# Altium PCB PCB1.PcbDoc
Units mil, origin at the board's own origin, x right, y up, seen from the top; angles counter-clockwise.
Board outline 4535 x 2760 mil, 2 copper layers (Top Layer, Bottom Layer); 39 components, 50 nets, 237 pads, 48 vias.
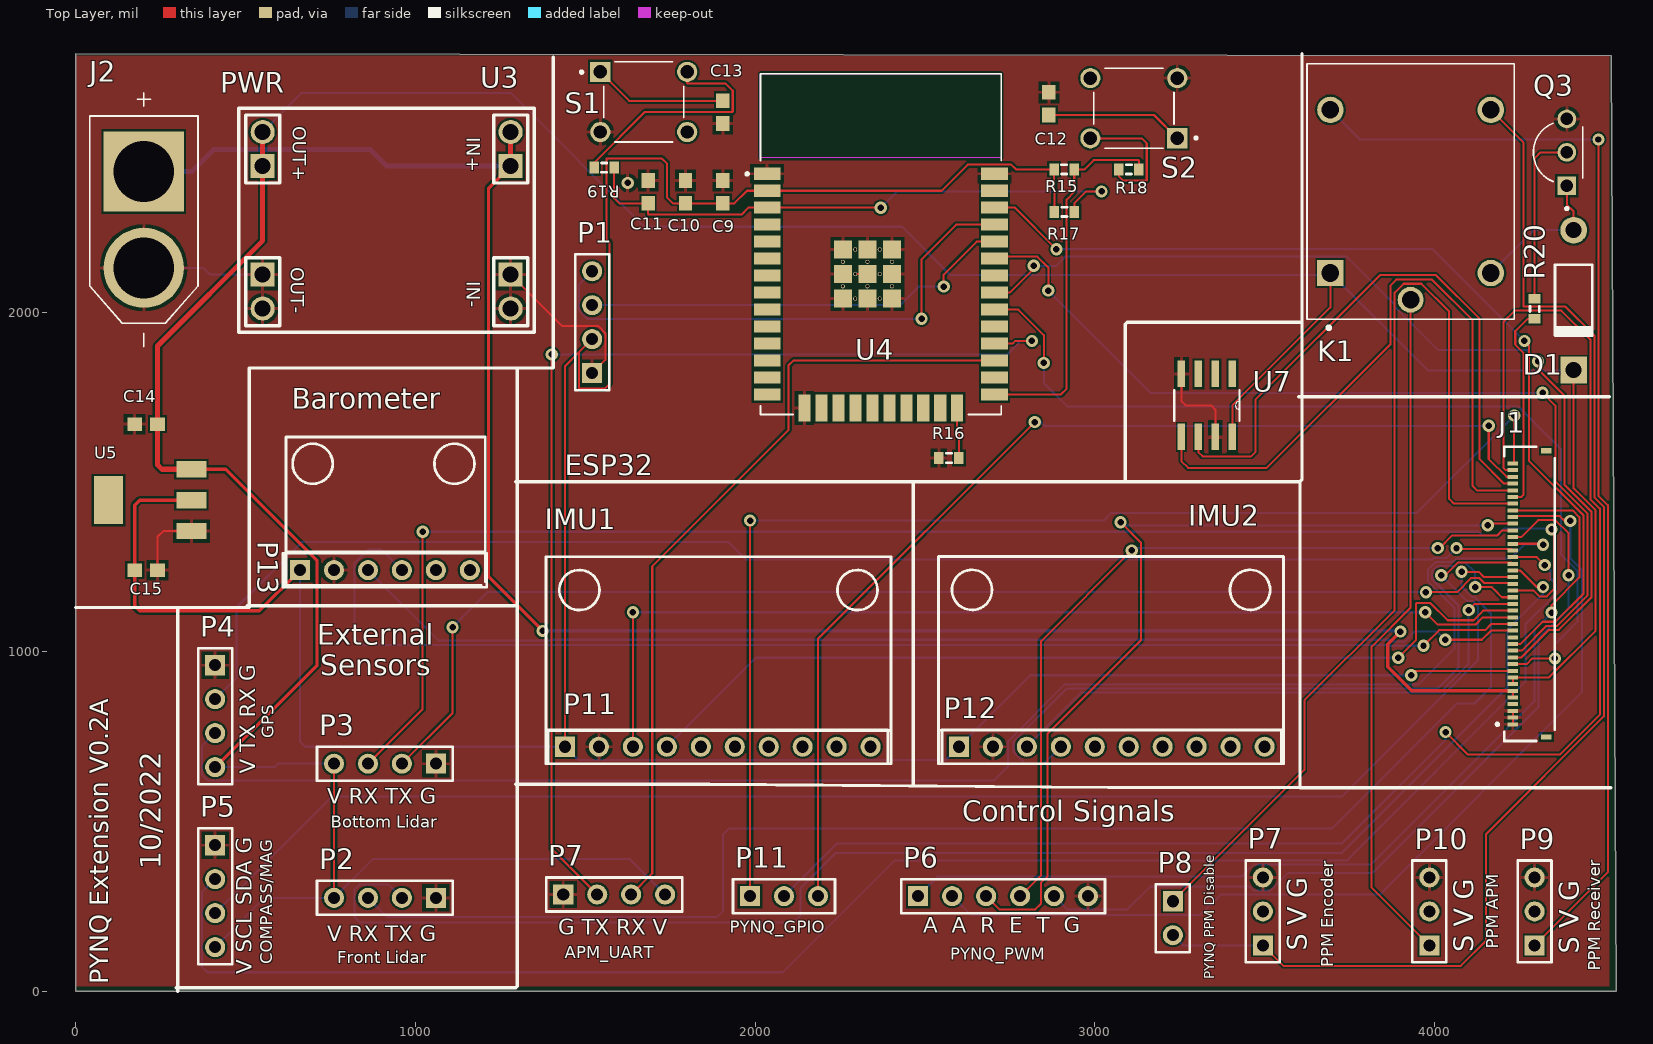
[diagram p0: Top Layer view]
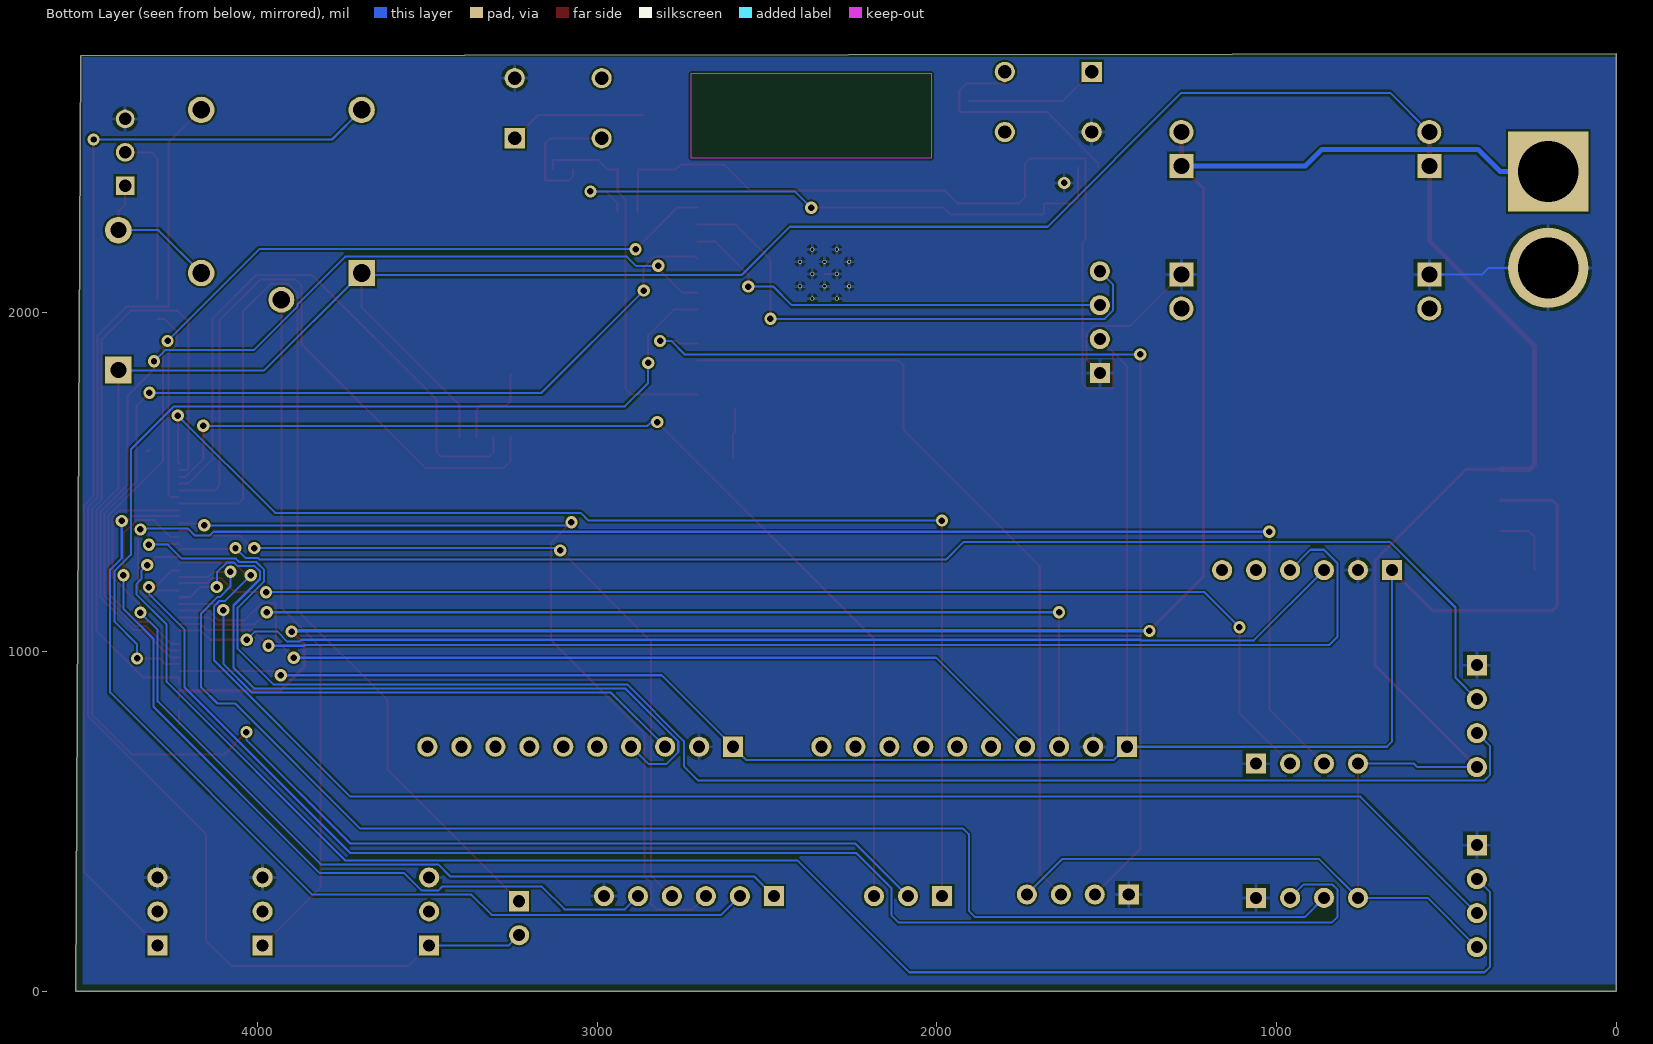
[diagram p1: Bottom Layer view, seen from below]

## Layer stack, top to bottom
Top Solder: solder mask 0.4, Solder Resist, Dk 3.5
Top Layer: signal copper 1.4
Dielectric 1: dielectric 12.6, FR-4, Dk 4.8
Bottom Layer: signal copper 1.4
Bottom Solder: solder mask 0.4, Solder Resist, Dk 3.5

## Board outline
0,0 4535,0 4520,2755 0,2760

## Design rules (kind name [scope] priority, off if disabled: settings)
Clearance [All] p1: gap=6 ignorepadtopadclearanceinfootprint=FALSE except(0: Arc-Hole Track-Hole SMDPad-Hole THPad-Hole Via-Hole Fill-Hole Poly-Hole Region-Hole Text-Hole)
MinimumSolderMaskSliver [All] p1: minsoldermaskwidth=3.8
PolygonConnect [All] p1: connectstyle=Relief reliefconductorwidth=10 reliefentries=4 polygonreliefangle="90 Angle" airgapwidth=10
RoomDefinition Sheet1 [InComponentClass('Sheet1')] p1 off: confinementstyle=ConfineIn formatcopy=TRUE lockcomponents=FALSE outline 4665,1570 8030,1570 8030,2485 4665,2485
RoomDefinition ESP32 [InComponentClass('ESP32')] p2 off: confinementstyle=ConfineIn formatcopy=TRUE lockcomponents=FALSE outline 4665,0 8390,0 8390,1160 4665,1160
RoomDefinition Voltage_Regulators [InComponentClass('Voltage_Regulators')] p3 off: confinementstyle=ConfineIn formatcopy=TRUE lockcomponents=FALSE outline 4665,2535 6880,2535 6880,3630 4665,3630
RoomDefinition Sensors [InComponentClass('Sensors')] p4 off: confinementstyle=ConfineIn formatcopy=TRUE lockcomponents=FALSE outline 4665,1210 10145,1210 10145,1520 4665,1520
RoutingVias [All] p1: holewidth=19 width=36 viastyle="Through Hole" minholewidth=18 minwidth=33 maxholewidth=28 maxwidth=50
SilkToSilkClearance [All] p1: silktosilkclearance=5
SilkToSolderMaskClearance [IsPad] p1: minsilkscreentomaskgap=3 clearancetoexposedcopper=TRUE
SolderMaskExpansion [All] p1: expansion=4 istentingtop=FALSE
Width [All] p1: maxlimit=15 minlimit=4.5 preferedwidth=6 minimp=50.000000 maximp=50.000000 favimp=50.000000
27 further rules are at their usual default settings.

## Classes and differential pairs
component class Voltage_Regulators: C14 C15 J2 U3 U5
component class Sheet1: D1 J1 K1 P2 P3 P4 P5 P6 P7 P8 P9 P10 P11 Q3 R20
component class Sensors: P11 P12 P13 U7
component class ESP32: C9 C10 C11 C12 C13 P1 R15 R16 R17 R18 R19 S1 S2 U4

## Components (designator, comment, footprint, x,y, rotation, side; value= is the part's Value field where it differs from the comment)
C9 "100uF/6.3V" CAPC1608X90 1905,2353.47 r270 top
C10 "1uF/10V" CAPC1608X90 1795,2353.46 r270 top
C11 "0.1uf" CAPC1608X90 1685,2353.46 r90 top
C12 "0.1uf" CAPC1608X90 2865,2613.46 r90 top
C13 "0.1uf" CAPC1608X90 1905,2588.46 r270 top
C14 "10uF" CAPC1608X90 206.54,1670 r180 top
C15 "10uF" CAPC1608X90 206.54,1240 r0 top
D1 "Diode 1N4001" DO-41 4410,2035 r270 top
J1 "FFC2B28-40-G" GCT_FFC2B28-40-G 4280,1170 r90 top
J2 "XT60-M" AMASS_XT60-M 200,2271.73 r270 top
K1 "SRD-05VDC-SL-C" RELAY_SRD-05VDC-SL-C 3930,2355 r90 top
P1 "ESP_UART" HDR1X4 1520,1820 r90 top
P2 "Lidar_F" HDR1X4 1060,275 r180 top
P3 "Lidar_B" HDR1X4 1060,670 r180 top
P4 "GPS_Prim" HDR1X4 410,960 r270 top
P5 "Compass_Prim" HDR1X4 410,430 r270 top
P6 "PWM_PYNQ" HDR1X6 2480,280 r0 top
P7 "APM_UART" HDR1X4 1435,285 r0 top
P7 "PPM_PYNQ_Encoder" HDR1X3 3495,135 r90 top
P8 "PPM_Jumper" HDR1X2 3230,265 r270 top
P9 "PPM_REC" HDR1X3 4295,135 r90 top
P10 "PPM_OUT" HDR1X3 3985,135 r90 top
P11 "IMU1" HDR1X10 1440,720 r0 top
P11 "GPIO" HDR1X3 1985,280 r0 top
P12 "IMU2" HDR1X10 2600,720 r0 top
P13 "BMP280" HDR1X6 660,1240 r0 top
Q3 "BC547B" TO92250P510H770-3 4364.21,2470 r90 top
R15 "Res3" J1-0603 2910,2420 r180 top value=10K
R16 "Res3" J1-0603 2570.47,1570 r180 top value="5k(Optional-internal pull down)"
R17 "Res3" J1-0603 2910.47,2295 r180 top value=10K(1%)
R18 "Res3" J1-0603 3100.47,2420 r0 top value=470R(1%)
R19 "Res3" J1-0603 1555.47,2425 r0 top value=470R(1%)
R20 "0603" J1-0603 4295,2009.53 r90 top value=10K
S1 "TS02-66-73-BK-100-SCR-D" SW_TS02-66-73-BK-100-SCR-D 1672.05,2618.58 r0 top
S2 "TS02-66-73-BK-100-SCR-D" SW_TS02-66-73-BK-100-SCR-D 3115,2600 r180 top
U3 "Component_1" PCBComponent_1 1210,2285 r180 top
U4 "ESP32-WROOM-32" MODULE_ESP32-WROOM-32 2370,2200 r0 top
U5 "AMS1117-3.3" SOT223 218,1446 r180 top
U7 "24LC256-I/SN" SOIC127P600X175-8N 3330,1725 r270 top

## Footprints (in the part's own frame and the unit in brackets; to place one, negate y for a bottom-side part, rotate by r counter-clockwise, add the part's x,y. Pads: shape width x height; smd on the part's side, far side on the other; paste and mask are expansions set on the pad)
AMASS_XT60-M [mm]
  round 6 hole 4.55: N(3.6,0)
  rect 6x6 hole 4.55: P(-3.6,0)
  silkscreen extent -9.5,-4.05 9.5,4.05, body extent -4.05,0 4.05,20.5, height 7.75
CAPC1608X90 [mm]
  rect 1.1x1 smd: 1(-0.85,0) 2(0.85,0)
DO-41 [mm] "Diode, Axial; Body 5.2 x 2.7 mm (LxDia. max), Lead Dia. 0.86 mm (max)"
  round 2 hole 1.2: 1(-5.23,0)
  rect 2x2 hole 1.2: 2(5.23,0)
  silkscreen extent -2.65,-1.4 2.75,1.4
GCT_FFC2B28-40-G [mm]
  rect 0.3x0.8 smd: 1(-9.75,1.25) 2(-9.25,1.25) 3(-8.75,1.25) 4(-8.25,1.25) 5(-7.75,1.25) 6(-7.25,1.25) 7(-6.75,1.25) 8(-6.25,1.25) 9(-5.75,1.25) 10(-5.25,1.25) 11(-4.75,1.25) 12(-4.25,1.25) 13(-3.75,1.25) 14(-3.25,1.25) 15(-2.75,1.25) 16(-2.25,1.25) 17(-1.75,1.25) 18(-1.25,1.25) 19(-0.75,1.25) 20(-0.25,1.25) 21(0.25,1.25) 22(0.75,1.25) 23(1.25,1.25) 24(1.75,1.25) 25(2.25,1.25) 26(2.75,1.25) 27(3.25,1.25) 28(3.75,1.25) 29(4.25,1.25) 30(4.75,1.25) 31(5.25,1.25) 32(5.75,1.25) 33(6.25,1.25) 34(6.75,1.25) 35(7.25,1.25) 36(7.75,1.25) 37(8.25,1.25) 38(8.75,1.25) 39(9.25,1.25) 40(9.75,1.25)
  rect 0.4x0.8 smd: S1(-10.7,-1.25) S2(10.7,-1.25)
  silkscreen extent -11,-1.9 11,2.5
HDR1X2 [mm] "Connector; Header; 2 Position"
  rect 1.5x1.5 hole 0.9: 1(0,0)
  round 1.5 hole 0.9: 2(2.54,0)
  silkscreen extent -1.27,-1.27 3.81,1.27
HDR1X3 [mm] "Connector; Header; 3 Position"
  rect 1.5x1.5 hole 0.9: 1(0,0)
  round 1.5 hole 0.9: 2(2.54,0) 3(5.08,0)
  silkscreen extent -1.27,-1.27 6.35,1.27
HDR1X4 [mm] "Connector; Header; 4 Position"
  rect 1.5x1.5 hole 0.9: 1(0,0)
  round 1.5 hole 0.9: 2(2.54,0) 3(5.08,0) 4(7.62,0)
  silkscreen extent -1.27,-1.27 8.89,1.27
HDR1X6 [mm] "Connector; Header; 6 Position"
  rect 1.5x1.5 hole 0.9: 1(0,0)
  round 1.5 hole 0.9: 2(2.54,0) 3(5.08,0) 4(7.62,0) 5(10.16,0) 6(12.7,0)
  silkscreen extent -1.27,-1.27 13.97,1.27
HDR1X10 [mm] "Connector; Header; 10 Position"
  rect 1.5x1.5 hole 0.9: 1(0,0)
  round 1.5 hole 0.9: 2(2.54,0) 3(5.08,0) 4(7.62,0) 5(10.16,0) 6(12.7,0) 7(15.24,0) 8(17.78,0) 9(20.32,0) 10(22.86,0)
  silkscreen extent -1.27,-1.27 24.13,1.27
J1-0603 [mm] "Chip Resistor, Body 1.6x0.8mm, IPC High Density"
  rect 0.7x0.9 smd: 1(-0.75,0) 2(0.75,0)
  silkscreen extent -0.2,-0.35 0.2,0.35, body extent -0.85,-0.48 0.85,0.48, height 0.9
MODULE_ESP32-WROOM-32 [mm]
  rect 2x0.9 smd: 1(-8.5,5.26) 2(-8.5,3.99) 3(-8.5,2.72) 4(-8.5,1.45) 5(-8.5,0.18) 6(-8.5,-1.09) 7(-8.5,-2.36) 8(-8.5,-3.63) 9(-8.5,-4.9) 10(-8.5,-6.17) 11(-8.5,-7.44) 12(-8.5,-8.71) 13(-8.5,-9.98) 14(-8.5,-11.25) 25(8.5,-11.25) 26(8.5,-9.98) 27(8.5,-8.71) 28(8.5,-7.44) 29(8.5,-6.17) 30(8.5,-4.9) 31(8.5,-3.63) 32(8.5,-2.36) 33(8.5,-1.09) 34(8.5,0.18) 35(8.5,1.45) 36(8.5,2.72) 37(8.5,3.99) 38(8.5,5.26)
  rect 0.9x2 smd: 15(-5.715,-12.25) 16(-4.445,-12.25) 17(-3.175,-12.25) 18(-1.905,-12.25) 19(-0.635,-12.25) 20(0.635,-12.25) 21(1.905,-12.25) 22(3.175,-12.25) 23(4.445,-12.25) 24(5.715,-12.25)
  rect 1.33x1.33 smd: 39_1(-2.835,-0.405) 39_2(-1,-0.405) 39_3(0.835,-0.405) 39_4(-2.835,-2.24) 39_5(-1,-2.24) 39_6(0.835,-2.24) 39_7(-2.835,-4.075) 39_8(-1,-4.075) 39_9(0.835,-4.075)
  round 0.3 hole 0.2: 39_10(-1.917,-0.405) 39_11(-0.082,-0.405) 39_12(-2.835,-1.322) 39_13(-1,-1.322) 39_14(0.835,-1.322) 39_15(-1.917,-2.24) 39_16(-0.082,-2.24) 39_17(-2.835,-3.157) 39_18(-1,-3.157) 39_19(0.835,-3.157) 39_20(-1.917,-4.075) 39_21(-0.082,-4.075)
  Keep-Out Layer region: 9,6.45 -9,6.45 -9,12.75 9,12.75
  Keep-Out Layer region: 9,6.45 -9,6.45 -9,12.75 9,12.75
  silkscreen extent -10.1,-12.75 9,12.75
PCBComponent_1 [mm]
  round 1.8 hole 1.2: 1(-1.778,6.985) 4(-1.778,-6.223) 5(16.764,6.985) 8(16.764,-6.223)
  rect 1.8x1.8 hole 1.2: 2(-1.778,4.445) 3(-1.778,-3.683) 6(16.764,4.445) 7(16.764,-3.683)
  silkscreen extent -3.56,-8 18.54,8.76
RELAY_SRD-05VDC-SL-C [mm]
  rect 1.98x1.98 hole 1.32: A1(-6.1,6)
  round 1.98 hole 1.32: A2(-6.1,-6) NC(6.1,6) NO(6.1,-6)
  round 1.935 hole 1.29: COM(-8.1,0)
  silkscreen extent -10.3,-7.75 9.55,7.75
SOIC127P600X175-8N [mil]
  rect 78x22 smd: 1(-93,75) 2(-93,25) 3(-93,-25) 4(-93,-75) 5(93,-75) 6(93,-25) 7(93,25) 8(93,75)
  silkscreen extent -46,-96 46,96
SOT223 [mil]
  rect 88x48 smd: 1(-122,91) 2(-122,0) 3(-122,-91)
  rect 86.61x141.73 smd: 4(122.01,0)
SW_TS02-66-73-BK-100-SCR-D [mm]
  rect 1.508x1.508 hole 1: 1(-3.25,2.25)
  round 1.508 hole 1: 2(3.25,2.25) 3(-3.25,-2.25) 4(3.25,-2.25)
  silkscreen extent -4.75,-3 3,3
TO92250P510H770-3 [mm]
  rect 1.4x1.4 hole 0.93: 1(-2.5,-0.655)
  round 1.4 hole 0.93: 2(0,-0.655) 3(2.5,-0.655)
  silkscreen extent -4.3,-1.85 2.18,1.85

## Part data
C9 C10 C11 C12 C13 C14 C15: library part C0603C104K5RACTU, "0.1ÂµF Â±10% 50V Ceramic Capacitor X7R 0603 (1608 Metric)", Package="0603 Kemet", Check_prices=https://www.snapeda.com/parts/C0603C104K5RACTU/KEMET/view-part/52584/?ref=eda, Digi-Key_Part_Number=399-5089-1-ND, MF=KEMET, MP=C0603C104K5RACTU, Purchase-URL=https://pricing.snapeda.com/search/part/C0603C104K5RACTU/?ref=eda, SnapEDA_Link=https://www.snapeda.com/parts/C0603C104K5RACTU/KEMET/view-part/52584/?ref=snap
D1: "1 Amp General Purpose Rectifier", Code_JEDEC=DO-204-AL, ComponentLink1Description="Manufacturer Link", ComponentLink1URL=http://www.fairchildsemi.com/, ComponentLink2Description=Datasheet, ComponentLink2URL=http://www.fairchildsemi.com/ds/1N%2F1N4001.pdf, DatasheetVersion=1998, LatestRevisionDate=17-Jul-2002, LatestRevisionNote="Re-released for DXP Platform.", PackageDescription="Diode, Axial; Body 5.2 x 2.7 mm (LxDia. max), Lead Dia. 0.86 mm (max)", PackageReference=DO-41, PackageVersion=Aug-1999, Published=8-Jun-2000, Publisher="Altium Limited"
J1: "40 Position FFC, FPC Connector Contacts, Top and Bottom 0.020 _0.50mm_ Surface Mount, Right Angle", Package="Package Analog Devices", Availability=Unavailable, MF="Global Connector Technology", MP=FFC2B28-40-G, Price=None, SnapEDA_Link=https://www.snapeda.com/parts/FFC2B28-40-G/Global%20Connector%20Technology/view-part/4223068/?ref=snap
J2: "Plug; DC supply; XT60; male; PIN: 2; for cable; soldered; 30A; 500V", Package=Package, Availability="Not in stock", Check_prices=https://www.snapeda.com/parts/XT60-M/AMASS/view-part/?ref=eda, MF=AMASS, MP=XT60-M, Price=None, SnapEDA_Link=https://www.snapeda.com/parts/XT60-M/AMASS/view-part/?ref=snap
K1: "5V Trigger Relay Module For Arduino And Raspberry Pi 5V Trigger Relay Module For Arduino And Raspberry Pi", Package=None, Availability=Unavailable, MP=SRD-05VDC-SL-C, Price=None
P1 P2 P3 P4 P5 P7: library part "Header 4", "Header, 4-Pin", LatestRevisionDate=17-Jul-2002, LatestRevisionNote="Re-released for DXP Platform.", Publisher="Altium Limited"
P6 P13: library part "Header 6", "Header, 6-Pin", LatestRevisionDate=17-Jul-2002, LatestRevisionNote="Re-released for DXP Platform.", Publisher="Altium Limited"
P7 P9 P10 P11: library part "Header 3", "Header, 3-Pin", LatestRevisionDate=17-Jul-2002, LatestRevisionNote="Re-released for DXP Platform.", Publisher="Altium Limited"
P8: library part "Header 2", "Header, 2-Pin", LatestRevisionDate=17-Jul-2002, LatestRevisionNote="Re-released for DXP Platform.", Publisher="Altium Limited"
P11 P12: library part "Header 10", "Header, 10-Pin", LatestRevisionDate=17-Jul-2002, LatestRevisionNote="Re-released for DXP Platform.", Publisher="Altium Limited"
Q3: "<a href=\"https://pricing.snapeda.com/parts/BC337-16%20A1/Taiwan%20Semiconductor/view-part?ref=eda\">Check availability</a> <a href=\"https://pricing.snapeda.com/parts/BC337-16%20A1/Taiwan%20Semiconductor/view-part?ref=eda\">Check availability</a>", Package=None, Availability=Unavailable, MP=BC547B, Price=None
R15 R16 R17 R18 R19: "Resistor", LatestRevisionDate=29-May-2009, LatestRevisionNote="IPC-7351 Footprint Added.", PackageDescription="Chip Resistor", PackageReference=J1-0603, Published=8-Jun-2000, Publisher="Altium Limited"
R20: library part Res3, "Resistor", LatestRevisionDate=29-May-2009, LatestRevisionNote="IPC-7351 Footprint Added.", PackageDescription="Chip Resistor", PackageReference=J1-0603, Published=8-Jun-2000, Publisher="Altium Limited"
S1 S2 U4: Package=None, Availability=Unavailable, Price=None
  S1 S2: MF="{'manufacturer': u'CUI'}", MP=TS02-66-73-BK-100-SCR-D
  U4: MP=ESP32-WROOM-32
U7: "EEPROM Memory IC 256Kb _32K x 8_ IÂ²C 400kHz 900ns 8-SOIC", Package="SOIC-8 Microchip", Availability=Unavailable, MF=Microchip, MP=24LC256-I/SN, Price=None, SnapEDA_Link=https://www.snapeda.com/parts/24LC256-I/SN/Microchip/view-part/9771/?ref=snap

## Via types
v1: diameter 36, hole 19, Top Layer to Bottom Layer, 48 vias

## Nets (pads, with @x,y where several pads share a name; then routed paths per layer and width w, separated by ;. In a path a pad name is that pad's centre, name@x,y a point inside that pad or via, vN(x,y) a via of type N, cw(c..) or ccw(c..) an arc to the next point about the centre after c; other vN are vias at no path point)
+3.3V: C9.2 C10.2 C15.1 J1.9 P1.2 P11.1@1440,720 P12.1 P13.1 R15.2 R17.2 U4.2 U5.2 | length 8930.5
  Top Layer w6: P11.1@1440,720 1440,1840 1481,1881 ; P1.2 1481,1881 ; R17.2 2880.94,2357 2880.47,2357.47 R15.2 2768,2420 2754,2434 2626,2434 2549.09,2357.09 U4.2 1976.09,2357.09 1939,2320 C9.2 C10.2 1757.5,2320 1740,2337.5 1740,2437.5 1725.78,2451.72 1563,2451.72 1562,2450.72 1562,2215 1571,2206 1571,1787.5 1558.5,1775 1482,1775 1481,1776 1481,1881 ; v1(3932,930.53) 3945.09,943.62 J1.9
  Top Layer w10: U5.2 187.5,1446 173.07,1431.57 C15.1 173.07,1134.43 187.5,1120 540,1120 P13.1
  Bottom Layer w6: P13.1 660,735 675,720 1440,720 1479,681 2561,681 P12.1 2810.53,930.53 v1(3932,930.53)
+5V: C14.1 D1.2 J1.7 J1.8 K1.A1 P2.4 P3.4 P4.4 P5.4 P7.4 U3.7 U3.8 U5.3 U7.8 | length 10621.8
  Top Layer w6: P2.4 P3.4 ; U7.8 3405,1725 3693.78,2013.78 K1.A1 ; J1.7 J1.8 4337.12,923.94 4475,1061.82 4475,1416.07 4410,1481.07 D1.2
  Top Layer w10: U5.3 441,1537 710,1268 710,960 P4.4
  Top Layer w15: U5.3 253,1537 240,1550 C14.1 240,1900 550,2210 U3.7 U3.8
  Bottom Layer w6: P5.4 555,275 P2.4 875,390 1630,390 P7.4 ; P4.4 585,660 595,670 P3.4 ; U3.8 665,2645 1280,2645 1674,2251 2433,2251 2575,2109 3687.94,2109 K1.A1 3980.62,1828 4408.91,1828 D1.2
BMP_SCL: J1.15 P13.3 | length 3493.1
  Top Layer w6: v1(4032,1035) 4139.8,1035 4166.53,1061.73 J1.15
  Bottom Layer w6: P13.3 1066.65,1033.35 1399.35,1033.35 1401,1035 3871.37,1035 3877,1029.37 3912.5,1029.37 3942.63,1059.5 4007.5,1059.5 v1(4032,1035)
BMP_SDA: J1.16 P13.4 | length 3844.9
  Top Layer w6: v1(3967.85,1017.37) 4013.94,1063.47 4149.57,1063.47 4167.51,1081.42 J1.16
  Bottom Layer w6: P13.4 900,1300 860,1300 821,1261 821,1043 844,1020 3861.35,1020 3863.98,1017.37 v1(3967.85,1017.37)
comp_scl: J1.25 P5.3 | length 4559.1
  Top Layer w6: v1(4020,1225) 4031.82,1225 4068.82,1262 4227.37,1262 J1.25
  Bottom Layer w6: P5.3 753,573 3726.97,573 4128,974.03 4128,1133.45 4112.18,1149.27 4095.73,1149.27 v1(4020,1225)
comp_sda: J1.26 P5.2 | length 5029.6
  Top Layer w6: J1.26 4301.73,1278.27 v1(4325,1255)
  Bottom Layer w6: P5.2 371,291 371,72.5 387.5,56 2081,56 2410.53,385.53 3742.53,385.53 4268,911 4268,1079.82 4357,1168.82 4357,1198.82 4342,1213.82 4342,1238 v1(4325,1255)
EEPROM_SCL: J1.37 U7.6 | length 1783.7
  Top Layer w6: U7.6 3305,1587.5 3317.5,1575 3460.5,1575 3473,1587.5 3473,1742 3840,2109 4004,2109 4133,1980 4133,1566.7 4204.89,1494.8 J1.37
EEPROM_SDA: J1.36 U7.5 | length 1928.4
  Top Layer w6: U7.5 3255,1561 3275,1541 3506,1541 3870.91,1905.91 3870.91,2078.6 3887.5,2095.19 3992.81,2095.19 4112.5,1975.5 4112.5,1487.62 4125,1475.12 J1.36
EN: C11.1 R17.1 R19.2 U4.3 | length 1711.3
  Top Layer w6: R19.2 1585,2335 1600,2320 C11.1 1685,2288 1686,2287 1960,2287 1980.09,2307.09 U4.3 v1(2370,2307.09) ; R17.1 2940,2320 2975,2355 v1(3020,2355)
  Bottom Layer w6: v1(2370,2307.09) 2417.91,2355 v1(3020,2355)
ESP_DEBUG_RXD: P1.3 U4.34 | length 1282.6
  Top Layer w6: v1(2555,2075) 2555,2110 2652.09,2207.09 U4.34
  Bottom Layer w6: P1.3 2427,2020 2482,2075 v1(2555,2075)
ESP_DEBUG_TXD: P1.4 U4.35 | length 1582.4
  Top Layer w6: v1(2490,1980) 2490,2155.09 2592,2257.09 U4.35
  Bottom Layer w6: P1.4 1481.47,2081.47 1481.47,2004.04 1505.51,1980 v1(2490,1980)
GND: C9.1 C10.1 C11.2 C12.2 C13.2 C14.2 C15.2 J1.1 J1.2 J1.3 J2.N P1.1 P2.1 P3.1 P4.1 P5.1 P6.6 P7.1@1435,285 P7.3@3495,335 P9.3 P10.3 P11.2@1540,720 P12.2 P13.2 Q3.3 R16.2 S1.3 S2.3 U3.1 U3.2 U3.5 U3.6 U4.1 U4.15 U4.38 U4.39_1 U4.39_2 U4.39_3 U4.39_4 U4.39_5 U4.39_6 U4.39_7 U4.39_8 U4.39_9 U4.39_10 U4.39_11 U4.39_12 U4.39_13 U4.39_14 U4.39_15 U4.39_16 U4.39_17 U4.39_18 U4.39_19 U4.39_20 U4.39_21 U5.1 U7.4 U7.7 | length 1394.8
  Top Layer w6: C15.2 240,1337.5 257.5,1355 U5.1 ; U3.2 1431,1959 1537.5,1959 1559,1937.5 1559,1859 P1.1 ; U4.39_15 U4.39_5 ; U7.4 3255,1737.5 3267.5,1725 3342.5,1725 3355,1712.5 U7.7 ; J1.1@4230,786.14 J1.1 J1.2 J1.3
  Bottom Layer w6: J2.N 375,2130 395,2110 U3.6
  other v1: 1625,2380
gps_rx: J1.27 P4.2 | length 4172.4
  Top Layer w6: v1(4065,1305) 4067.27,1302.73 4226.01,1302.73 J1.27
  Bottom Layer w6: P4.2 473,923 473,1130 666,1323 1921,1323 1973,1271 3993.88,1271 3998.88,1276 4036,1276 v1(4065,1305)
gps_tx: J1.28 P4.3 | length 4761.9
  Top Layer w6: J1.28 4317.36,1317.64 v1(4320,1315)
  Bottom Layer w6: P4.3 371,721 371,637.5 387.5,621 2703.5,621 2745,662.5 2745,736.46 2912.07,903.53 3953.53,903.53 4059,1009 4059,1129.18 3981,1207.18 3981,1241.15 4003.85,1264 4053.85,1264 4063.85,1274 4223,1274 4264,1315 v1(4320,1315)
IO0: R15.1 R18.2 U4.25 | length 1102.7
  Top Layer w6: U4.25 2900,1757.09 2917,1774.09 2917,2331 2939.53,2353.53 R15.1 2970,2420 2997,2447 3129,2447 3130,2446 R18.2
lidar_b_rx: J1.21 P3.3 | length 4403.6
  Top Layer w6: P3.3 1021,831 v1(1021,1353) ; J1.21 4291.97,1179.84 4308.82,1163 4331.18,1163 4352,1183.82 4352,1353 v1(4345,1360)
  Bottom Layer w6: v1(1021,1353) 4130.22,1353 4141.68,1341.54 4184.22,1341.54 4204.68,1362 4343,1362 v1(4345,1360)
lidar_b_tx: J1.22 P3.2 | length 3652.8
  Top Layer w6: P3.2 1109,819 v1(1109,1072) ; v1(3975,1175) 4066.82,1175 4108.82,1217 4131.18,1217 4146.18,1202 4228.32,1202 J1.22
  Bottom Layer w6: v1(1109,1072) 1212,1175 v1(3975,1175)
lidar_f_rx: J1.23 P2.3 | length 4279.2
  Top Layer w6: v1(4080,1235) 4130.15,1235 4145.94,1219.21 J1.23
  Bottom Layer w6: P2.3 917,218 1887.5,218 1906,236.5 1906,462.5 1922.5,479 3697.19,479 4065.37,847.19 4118.19,847.19 4166,895 4166,1112.42 4117.15,1161.27 4110.55,1161.27 4080,1191.82 v1(4080,1235)
lidar_f_tx: J1.24 P2.2 | length 4425.8
  Top Layer w6: J1.24 4253.1,1238.9 4302,1190 v1(4320,1190)
  Bottom Layer w6: P2.2 921,314 835,314 821,300 821,218.5 837.5,202 2112.5,202 2134,223.5 2134,304 2237,407 3727.64,407 4215,894.36 4215,1065 4320,1170 v1(4320,1190)
MPU1_SCL: J1.17 P11.3@1640,720 | length 3010.8
  Top Layer w6: P11.3@1640,720 v1(1640,1116) ; v1(3973,1116) 4009.46,1079.54 4120.97,1079.54 4142.53,1101.1 J1.17
  Bottom Layer w6: v1(1640,1116) v1(3973,1116)
MPU1_SDA: J1.18 P11.4 | length 2761.7
  Top Layer w6: v1(3893.5,982) 3946,1034.5 3946,1142 3947,1143 3988.44,1143 4039,1092.44 4115.44,1092.44 4143.79,1120.79 J1.18
  Bottom Layer w6: P11.4 2002,982 v1(3893.5,982)
MPU2_SCL: J1.19 P12.3 | length 1697.7
  Top Layer w6: v1(4101,1122.27) 4119.2,1140.47 J1.19
  Bottom Layer w6: P12.3 2959.53,879.53 4016.53,879.53 4101,964 v1(4101,1122.27)
MPU2_SDA: J1.20 P12.4 | length 2237.4
  Top Layer w6: v1(4120,1190) 4169,1190 4179,1180 4198.84,1160.16 J1.20
  Bottom Layer w6: P12.4 2848.53,668.53 2796.99,668.53 2761.47,704.04 2761.47,735.96 2917.04,891.53 4009.53,891.53 4071,953 4071,1135.82 3993,1213.82 3993,1236.18 4008.82,1252 4058.82,1252 4068.82,1262 4091.18,1262 4120,1233.18 v1(4120,1190)
NetC12_1: C12.1 S2.1 | length 406.4
  Top Layer w6: C12.1 3174.37,2580 S2.1
NetC13_1: C13.1 S1.1 | length 396.2
  Top Layer w6: S1.1 1629.33,2621.93 C13.1
NetD1_1: D1.1 K1.A2 Q3.1 | length 434.9
  Top Layer w6: Q3.1 4390,2316 4410,2296 D1.1
  Bottom Layer w6: K1.A2 4292.28,2240.91 D1.1
NetJ1_38: J1.38 P11.3@2185,280 | length 3192.4
  Top Layer w6: P11.3@2185,280 2185,1038 v1(2823,1676) ; v1(4160,1665) 4160,1566.99 4212.5,1514.49 J1.38
  Bottom Layer w6: v1(2823,1676) 2841,1676 2852,1665 v1(4160,1665)
NetJ1_39: J1.39 P11.2@2085,280 | length 4572.3
  Top Layer w6: v1(4033,763) 4099,697 4369.5,697 4487,814.5 4487,1421.04 4459,1449.04 4459,1919 4374,2004 4236.5,2004 4203,1970.5 4203,1541 4209.83,1534.17 J1.39
  Bottom Layer w6: P11.2@2085,280 2240,435 3727,435 4033,741 v1(4033,763)
NetJ1_40: J1.40 P11.1@1985,280 | length 3628.4
  Top Layer w6: P11.1@1985,280 v1(1985,1386) ; J1.40@4230,1553.86 J1.40 4232.09,1553.86 4235,1556.76 v1(4235,1695)
  Bottom Layer w6: v1(1985,1386) 3026.36,1386 3048.84,1408.48 3948.48,1408.48 v1(4235,1695)
NetK1_COM: K1.COM P10.1 | length 2019.2
  Top Layer w6: K1.COM 3930,1129.91 3815,1014.91 3815,305 P10.1
NetK1_NC: K1.NC P9.1 | length 3299.4
  Top Layer w6: P9.1 4511,351 4511,1430.98 4483,1458.98 v1(4483,2508)
  Bottom Layer w6: K1.NC 3780.94,2508 v1(4483,2508)
NetK1_NO: K1.NO P7.1@3495,135 P8.2 | length 3789.4
  Top Layer w6: P7.1@3495,135 3555,75 4078,75 4152,149 4152,462.5 4499,809.5 4499,1426.01 4471,1454.01 4471,1931 4386,2016 4263.5,2016 4262.5,2017 4262.5,2498.88 K1.NO
  Bottom Layer w6: P8.2 3260,135 P7.1@3495,135
NetQ3_2: Q3.2 R20.2 | length 515.7
  Top Layer w6: R20.2 4295,2452.5 4312.5,2470 Q3.2
NetR16_1: R16.1 U4.24 | length 149.8
  Top Layer w6: U4.24 2595,1646 2600,1641 R16.1
NetR18_1: R18.1 S2.2 | length 388.5
  Top Layer w6: S2.2 3138.08,2511.42 3153,2496.5 3153,2388 3152,2387 3083.94,2387 3070.94,2400 R18.1
NetR19_1: R19.1 S1.2 | length 723
  Top Layer w6: R19.1 1525.94,2439.75 1675.19,2589 1933,2589 1934,2590 1934,2651.5 1912.5,2673 1801,2673 1800,2674 S1.2
PPM_Switch_Sig: J1.35 R20.1 | length 597.8
  Top Layer w6: J1.35 4256,1455.43 4262,1461.43 4262,1879.82 4238,1903.82 4238,1943.5 4274.5,1980 R20.1
PWM_ALI1: J1.32 P6.2 | length 2843.3
  Top Layer w6: J1.32 4233.41,1399 4369.18,1399 4383.18,1385 v1(4400,1385)
  Bottom Layer w6: P6.2 2635,225 3311,225 3370.47,284.47 3838.47,284.47 4434,880 4434,1241.15 4400,1275.15 v1(4400,1385)
PWM_ALI2: J1.33 P6.1 | length 2854.1
  Top Layer w6: J1.33 4407.12,1416.06 4427,1396.18 4427,1218.82 4345,1136.82 v1(4345,1115)
  Bottom Layer w6: P6.1 2538,338 3433,338 3468.53,373.53 3814.51,373.53 4294.5,853.52 4294.5,1064.5 v1(4345,1115)
PWM_ELV: J1.30 P6.4 | length 2300.5
  Top Layer w6: P6.4 2842,342 2842,1031 v1(3109,1298) ; v1(4010,1305) 4015,1305 4051.54,1341.54 4184.22,1341.54 4199.68,1357.01 J1.30
  Bottom Layer w6: v1(3109,1298) 3116,1305 v1(4010,1305)
PWM_ESC: J1.29 P6.5 | length 2447.5
  Top Layer w6: J1.29 4256,1337.32 4305.68,1387 4356.18,1387 4395,1348.18 v1(4395,1225)
  Bottom Layer w6: P6.5 2919,241 3096,241 3163,308 3457,308 3468.53,296.47 3516.97,296.47 3568.5,348 3817,348 4306.5,837.5 4306.5,1038.32 4395,1126.82 v1(4395,1225)
PWM_RUD: J1.31 P6.3 | length 2615.3
  Top Layer w6: P6.3 2719,241 2825,241 2841,257 2841,319 2861,339 2861,759 3136,1034 3136,1321 v1(3076,1381) ; v1(4157,1372) 4161.69,1376.69 J1.31
  Bottom Layer w6: v1(3076,1381) 3085,1372 v1(4157,1372)
PYNQ_PPM: J1.34 P8.1 | length 3012.4
  Top Layer w6: P8.1 3617,652 3617,856.46 3882.91,1122.37 3882.91,2056.91 3909.19,2083.19 3961.81,2083.19 4043.5,2001.5 4043.5,1450 4057.76,1435.75 J1.34
TEL_APM_RXD_U2: P7.3@1635,285 U4.27 | length 2362
  Top Layer w6: P7.3@1635,285 1697,347 1697,1251 2098,1652 2098,1842.59 2112.5,1857.09 U4.27
TEL_APM_TXD_U2: P7.2@1535,285 U4.28 | length 3189.7
  Top Layer w6: v1(1401,1875) 1401,419 P7.2@1535,285 ; U4.28 2757.91,1907.09 2765.83,1915 v1(2815,1915)
  Bottom Layer w6: v1(1401,1875) 2742,1875 2782,1915 v1(2815,1915)
TEL_SENS_RXD_SWU2: J1.12 U4.33 | length 2761.1
  Top Layer w6: U4.33 2710.56,2163 2831.18,2163 2863.09,2131.1 v1(2863.09,2063) ; J1.12 4256.68,1002.68 4330.01,1076 4361.15,1076 4451,1165.85 4451,1406.12 4356,1501.12 4356,1724.5 v1(4318.5,1762)
  Bottom Layer w6: v1(2863.09,2063) 3164.09,1762 v1(4318.5,1762)
TEL_SENS_TXD_SWU2: J1.13 U4.36 | length 2808.7
  Top Layer w6: U4.36 2765,2307.09 v1(2887.09,2185) ; J1.13 4253.36,1022.36 4319,1088 4356.18,1088 4439,1170.82 4439,1401.15 4278,1562.15 4278,1902 v1(4265,1915)
  Bottom Layer w6: v1(2887.09,2185) 3995,2185 v1(4265,1915)
TEL_ZYNQ_RXD_SWU1: J1.10 U4.30 | length 2716
  Top Layer w6: U4.30 2775,2007.09 2850,1932.09 v1(2850,1850) ; J1.10 4271.31,963.31 4288,980 v1(4355,980)
  Bottom Layer w6: v1(2850,1850) 2850,1791 2919,1722 4246.18,1722 4373,1595.18 4373,1285.18 4422,1236.18 4422,1089 4355,1022 v1(4355,980)
TEL_ZYNQ_TXD_SWU1: J1.11 U4.31 | length 2845.8
  Top Layer w6: U4.31 2750.09,2057.09 2820,2127 v1(2820,2136) ; J1.11 4256.42,982.99 4337.43,1064 4366.12,1064 4463,1160.88 4463,1411.1 4383,1491.1 4383,1754 4305,1832 v1(4305,1855)
  Bottom Layer w6: v1(2820,2136) 2886,2136 2913,2163 3742,2163 3882,2023 3882,2017.51 4011.51,1888 4272,1888 v1(4305,1855)
VIN: J1.5 J1.6 J2.P U3.3 U3.4 | length 5752
  Top Layer w6: J1.5 J1.6
  Top Layer w10: U3.3 1215,2365 1215,1220 v1(1374,1061) ; v1(3900,1059) 3863,1022 3863,955 3933.43,884.57 J1.6
  Top Layer w15: U3.3 U3.4
  Bottom Layer w6: v1@3898,1061 v1(3900,1059)
  Bottom Layer w10: v1(1374,1061) v1@3898,1061
  Bottom Layer w15: J2.P 341.46,2413.46 407,2479 866,2479 915,2430 U3.3
pads on no net: J1.4 J1.14 J1.S1 J1.S2 P7.2@3495,235 P9.2 P10.2 P11.5 P11.6 P11.7 P11.8 P11.9 P11.10 P12.5 P12.6 P12.7 P12.8 P12.9 P12.10 P13.5 P13.6 S1.4 S2.4 U4.4 U4.5 U4.6 U4.7 U4.8 U4.9 U4.10 U4.11 U4.12 U4.13 U4.14 U4.16 U4.17 U4.18 U4.19 U4.20 U4.21 U4.22 U4.23 U4.26 U4.29 U4.32 U4.37 U5.4 U7.1 U7.2 U7.3
copper on no net: | length 14.8
  Top Layer w6: 4316.47,1596.13 4321.34,1591.26 4329.21,1591.26

## Polygon pours and split planes (outlines as drawn)
GND on Bottom Layer "GND_L02_P006" (solid, pour order 6): 0,2750 4515,2750 4515,20 0,20
no net on Bottom Layer "NONET_L02_P002" (solid, pour order 2): 0,2750
no net on Bottom Layer "NONET_L02_P001" (solid, pour order 1): 0,170
GND on Top Layer "GND_L01_P003" (solid, pour order 3): 5,2755 4515,2755 4515,15 0,15 0,2755
no net on Top Layer "NONET_L01_P007" (solid, pour order 7): 5,2755

## Silkscreen, mask and mechanical layers (free items; w line width, h text height)
Top Overlay:
  circle w8: c697.17,1553.08 r59.06
  circle w8: c1114.49,1553.08 r59.06
  circle w8: c2638.43,1181.81 r59.06
  circle w8: c2301.32,1181.32 r59.06
  circle w8: c3457.32,1181.81 r59.06
  circle w8: c1482.43,1181.32 r59.06
  lines w8: 618.43,1194.81 1193.23,1194.81 618.43,1194.81 ; 618.43,1194.81 618.43,1631.82 1205,1631.82 1205,1206.58 1205,1293.24 618.43,1293.24 618.43,1194.81 ; 1384,669.51 2399.75,669.51 ; 1384,669.51 2399.75,669.51 ; 1384,669.51 1384,767.94 2399.75,767.94 2399.75,669.51 ; 1384,669.51 1384,1279.75 2399.75,1279.75 2399.75,669.51 ; 2540,670 3555.75,670 ; 2540,670 3555.75,670 ; 2540,670 2540,1280.24 3555.75,1280.24 3555.75,670 ; 2540,670 2540,768.43 3555.75,768.43 3555.75,670
  lines w10: 0,1130 40,1130 510,1130 510,1690 ; 295,10 500,10 1295,10 ; 300,0 300,1130 ; 505,1135 1300,1135 ; 510,1695 510,1835 1300,1835 ; 1295,610 1865,610 3040,600 3604.14,600 3604.14,1500 ; 1295,1500 3090,1500 ; 1300,15 1300,1685 ; 1300,1680 1300,1835 ; 1405,2750 1405,1835 1300,1835 ; 2465,605 2465,1495 ; 3600,1750 4515,1750 ; 3604.14,599.14 4519.14,599.14 ; 3610,2760 3610,1970 ; 3090,1500 3090,1964.14 3095.86,1970 3610,1970 ; 3090,1500 3604.14,1500 ; 3604.14,1500 3610,1505.86 3610,1970
  text "PWR" at 425,2645 h60
  text "Barometer" at 635,1715 h60
  text "ESP32" at 1440,1520 h60
  text "IMU2" at 3275,1370 h60
  text "IMU1" at 1380,1360 h60
  text "External" at 710,1020 h60
  text "Sensors" at 720,930 h60
  text "GPS" at 595,745 h60 r90
  text "V TX RX G" at 544.13,640 h80 r90
  text "V RX TX G" at 740,535.87 h80
  text "Control Signals" at 2610,499.99 h60
  text "Bottom Lidar" at 750,470 h60
  text "10/2022" at 250,360 h60 r90
  text "PYNQ_GPIO" at 1925.03,160.65 h60
  text "A  A  R  E  T  G" at 2495,155.87 h80
  text "G TX RX V" at 1420,150.87 h80
  text "V RX TX G" at 740,130.87 h80
  text "PPM APM" at 4200,125.03 h60 r90
  text "S V G" at 3643.92,120 h100 r90
  text "S V G" at 4133.92,115 h100 r90
  text "S V G" at 4443.92,110 h100 r90
  text "APM_UART" at 1440,85.65 h60
  text "PYNQ_PWM" at 2575.03,80.65 h60
  text "COMPASS/MAG" at 590,80 h60 r90
  text "Front Lidar" at 770,70 h60
  text "PPM Encoder" at 3714.38,70.03 h60 r90
  text "PPM Receiver" at 4499.38,60.02 h60 r90
  text "V SCL SDA G" at 534.13,50 h80 r90
  text "PYNQ PPM Disable" at 3362.52,35.02 h50 r90
  text "PYNQ Extension V0.2A" at 95,20 h55 r90
Mechanical 1:
  lines w0.5: 0.25,0.25 0.25,2756.16 4527.81,2756.16 4527.81,0.25 0.25,0.25
Mechanical 2:
  lines w0.5: 0.25,96.17 0.25,533.18 0.25,434.75

## Text inside footprints (layer, text, board x,y; h text height)
U3: Top Overlay "IN-" at 1150.31,2090 h39.37 r270; Top Overlay "IN+" at 1150.31,2515 h39.37 r270; Top Overlay "OUT-" at 632.99,2132.01 h39.37 r270; Top Overlay "OUT+" at 637.99,2547.01 h39.37 r270
U4: Mechanical 13 "ANTENNA" at 2133.78,2554.33 h70